# EAGLE board bluebox (EAGLE 8.5.1)
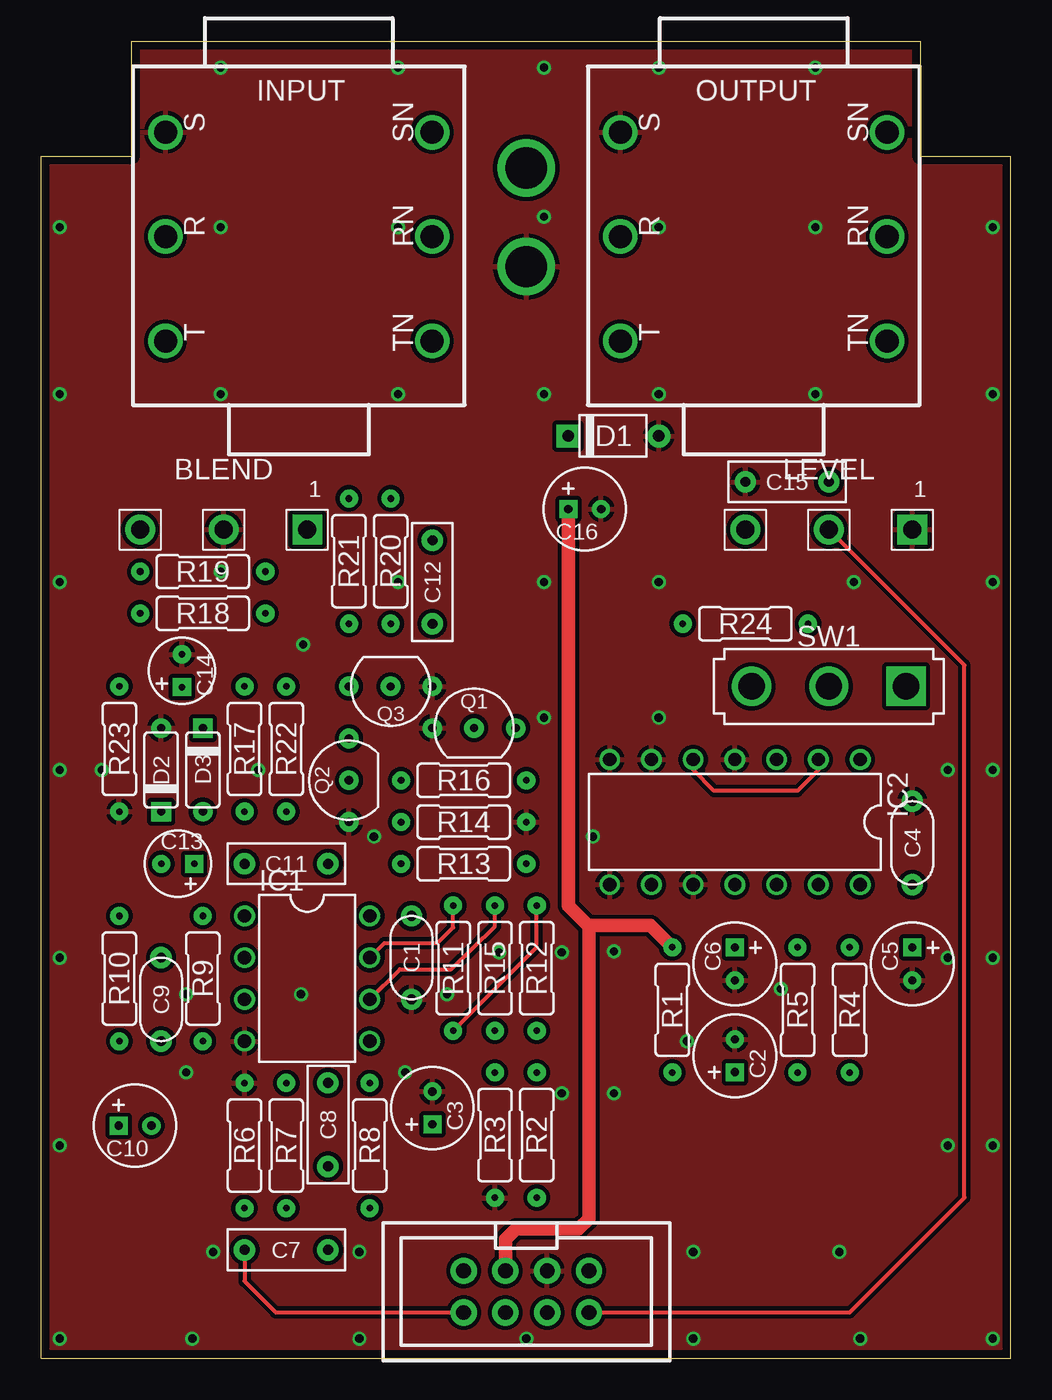
[diagram p0: board, top side]
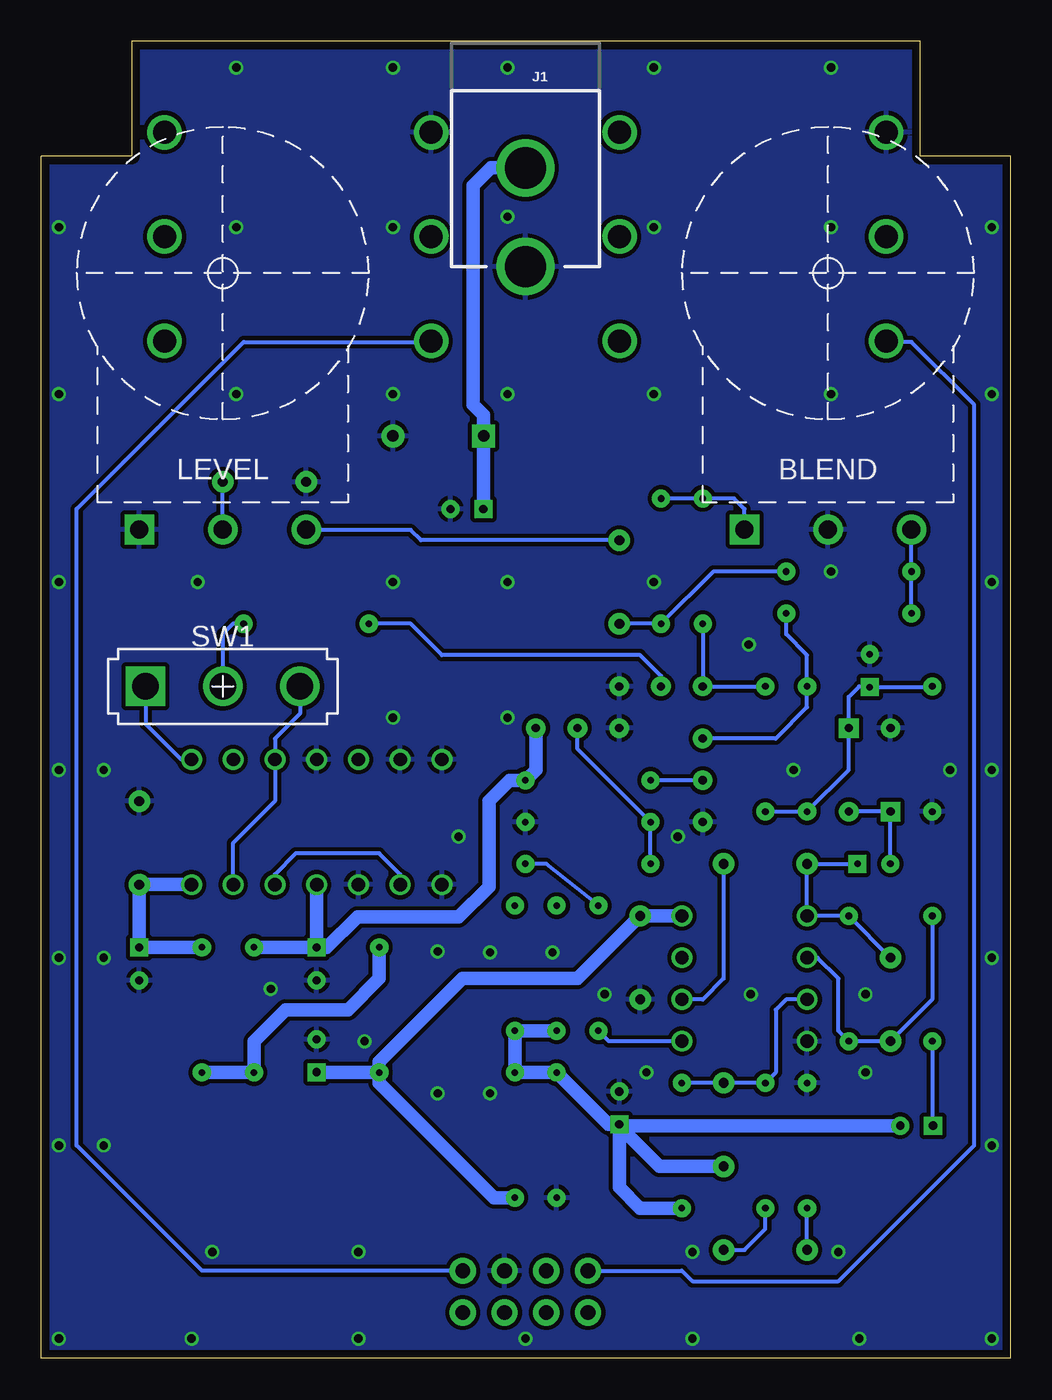
[diagram p1: board, bottom side, seen from below]

Size 59 x 80.16 mm. Coordinates in mm from the lower left corner, seen from the top.
Copper layers (1*16): Top 0.035mm / dielectric 1.6mm / Bottom 0.035mm
Design rules "Elecrow_2-layer_PCB_eagle_rule": minimum track width 6mil, minimum drill 12mil, track to track 6mil, track to pad 6mil, pad to pad 6mil, via to via 8mil, smd to smd 0mil, copper to edge 20mil, drill to drill 10mil, minimum pad ring 6mil, minimum via ring 6mil, stop-mask expansion 0mil, vias tented up to drill 100mil, thermal gap 10mil

## Footprints (pad centres in the part's own frame; a part is rotated, then mirrored left to right if it is on the bottom)
16MM = drill 1.1 pad 1.8 square: 1 5.08,-1 | drill 1.1 pad 1.8: 2 0,-1; 3 -5.08,-1
050X030_025_2 = drill 0.6 pad 1.3: 1 -2.54,0; 2 2.54,0
050_020 = drill 0.5 pad 1.1 square: + -0.998,0.001 | drill 0.5 pad 1.1: - 0.998,0.001
BOX_SMALL = drill 0.6 pad 1.3: 1 -2.54,0; 2 2.54,0
040_020 = drill 0.4 pad 1.1 square: + -1.001,0 | drill 0.4 pad 1.1: - 1.001,0
DO41-2 = drill 0.7 pad 1.4: A 2.794,0 | drill 0.7 pad 1.4 square: C -2.731,0
DO35-2 = drill 0.5 pad 1.2: A 2.54,0 | drill 0.5 pad 1.2 square: C -2.54,0
DIL0 = drill 0.813 pad 1.27: 1 -3.81,-3.81; 2 -1.27,-3.81; 3 1.27,-3.81; 4 3.81,-3.81; 5 3.81,3.81; 6 1.27,3.81; 7 -1.27,3.81; 8 -3.81,3.81
DIL14 = drill 0.813 pad 1.27: 1 -7.62,-3.81; 2 -5.08,-3.81; 3 -2.54,-3.81; 4 0,-3.81; 5 2.54,-3.81; 6 5.08,-3.81; 7 7.62,-3.81; 8 7.62,3.81; 9 5.08,3.81; 10 2.54,3.81; 11 0,3.81; 12 -2.54,3.81; 13 -5.08,3.81; 14 -7.62,3.81
NMJ6HCD2 = drill 1.4: R 0,8.115; RN 0,-8.115; S 6.35,8.115; SN 6.35,-8.115; T -6.35,8.115; TN -6.35,-8.115
POWER_JACK_PTH = drill 2.5: GND 0,7.7; PWR 0,13.7
TO92- = drill 0.5 pad 1.2: 1 2.54,0; 2 0,0; 3 -2.54,0
R0207/3 = drill 0.4 pad 1.1: 1 -3.81,0; 2 3.81,0
1MS1T1B1C0M2QE = drill 1.6 square: 1 4.699,0 | drill 1.6: 2 0,0; 3 -4.699,0
PAK100/2500-10 = drill 0.9 pad 1.6: 1 -3.81,-1.27; 2 -3.81,1.27; 3 -1.27,-1.27; 4 -1.27,1.27; 5 1.27,-1.27; 6 1.27,1.27; 7 3.81,-1.27; 8 3.81,1.27

## Placement (x,y rotation side)
BLEND  100kB  [16MM]  11.11,51.43 0 top
C1  100n  [050X030_025_2]  22.54,24.38 270 top
C2  100u  [050_020]  42.23,18.41 90 top
C3  47u  [050_020]  23.81,15.24 90 top
C4  100n  [050X030_025_2]  53.02,31.37 90 top
C5  100u  [050_020]  53.02,24 270 top
C6  100u  [050_020]  42.23,24 270 top
C7  10n  [BOX_SMALL]  14.92,6.6 180 top
C8  1n  [BOX_SMALL]  17.46,14.22 270 top
C9  330p  [050X030_025_2]  7.3,21.84 270 top
C10  10u  [050_020]  5.71,14.16 0 top
C11  47n  [BOX_SMALL]  14.92,30.1 180 top
C12  47n  [BOX_SMALL]  23.81,47.24 90 top
C13  1u  [040_020]  8.32,30.1 180 top
C14  1u  [040_020]  8.57,41.85 90 top
C15  6.8n  [BOX_SMALL]  45.4,53.34 180 top
C16  100u  [050_020]  33.08,51.69 0 top
D1  1N4002  [DO41-2]  34.8,56.13 0 top
D2  1N914  [DO35-2]  7.3,35.81 90 top
D3  1N914  [DO35-2]  9.84,35.81 270 top
IC1  [DIL0]  16.19,23.11 270 top
IC2  4013N  [DIL14]  42.23,32.64 180 top
INPUT  [NMJ6HCD2]  15.68,68.26 90 top
J1  POWER_JACK  [POWER_JACK_PTH]  29.53,80.14 180 bottom
LEVEL  100kB  [16MM]  47.94,51.43 0 top
OUTPUT  [NMJ6HCD2]  43.37,68.26 90 top
Q1  2N3904  [TO92-]  26.35,38.35 0 top
Q2  2N3904  [TO92-]  18.73,35.18 90 top
Q3  2N3904  [TO92-]  21.27,40.89 180 top
R1  47  [R0207/3]  38.42,21.21 270 top
R2  56k  [R0207/3]  30.16,13.59 90 top
R3  56k  [R0207/3]  27.62,13.59 90 top
R4  330  [R0207/3]  49.21,21.21 90 top
R5  10k  [R0207/3]  46.04,21.21 90 top
R6  2.2M  [R0207/3]  12.38,12.95 270 top
R7  150k  [R0207/3]  14.92,12.95 90 top
R8  1M  [R0207/3]  20,12.95 90 top
R9  470k  [R0207/3]  9.84,23.11 90 top
R10  150k  [R0207/3]  4.76,23.11 90 top
R11  1M  [R0207/3]  25.08,23.75 90 top
R12  10k  [R0207/3]  30.16,23.75 90 top
R13  56k  [R0207/3]  25.72,30.1 180 top
R14  10k  [R0207/3]  25.72,32.64 180 top
R15  56k  [R0207/3]  27.62,23.75 90 top
R16  1M  [R0207/3]  25.72,35.18 180 top
R17  56k  [R0207/3]  12.38,37.08 270 top
R18  56k  [R0207/3]  9.84,45.34 180 top
R19  56k  [R0207/3]  9.84,47.88 180 top
R20  56k  [R0207/3]  21.27,48.51 90 top
R21  56k  [R0207/3]  18.73,48.51 270 top
R22  56k  [R0207/3]  14.92,37.08 270 top
R23  56k  [R0207/3]  4.76,37.08 90 top
R24  1M  [R0207/3]  42.86,44.7 0 top
SW1  [1MS1T1B1C0M2QE]  47.94,40.89 0 top
U$2  [125B_PCB_HUGE]  0,-7.62 0 top  (outside the outline)
X1  2510-  [PAK100/2500-10]  29.53,4.06 180 top

## Library data of the parts
BLEND LEVEL = pedals-potentiometers
C1 C4 C7-C9 C11 C12 C15 = pedals-capacitors-film
C2 C3 C5 C6 C10 C13 C14 C16 = pedals-capacitors-elec
D1-D3 = pedals-diodes
IC1 IC2 = pedals-integrated circuits
INPUT OUTPUT = pedals-jacks
J1 = pedals-jacks; PROD_ID: CONN-08197
Q1-Q3 = pedals-transistors
R1-R24 = pedals-resistors
SW1 = pedals-switches
U$2 = pedals-pcb
X1 = pedals-headers; MF: 3M; MPN: 2510-6002UB; OC_FARNELL: 9838244; OC_NEWARK: 46F4725

## Nets
+9V: C16.+ D1.C J1.GND R1.1 R4.1 R5.1 X1.5
GND: BLEND.2 C1.2 C2.- C3.- C4.2 C5.- C6.- C14.- C15.2 C16.- D1.A D2.A IC1.4 IC2.4 IC2.6 IC2.7 IC2.8 IC2.10 INPUT.S J1.PWR LEVEL.1 OUTPUT.S Q1.3 Q2.3 Q3.3 R3.1 R6.1 R14.1 R23.1 X1.3
IN: C7.2 R6.2 X1.8
N$1: Q3.1 R21.2 R22.1
N$2: INPUT.T X1.7
N$3: C7.1 R7.1
N$4: OUTPUT.T X1.1
N$5: C8.1 IC1.3 R7.2 R8.2
N$6: C9.2 IC1.2 R9.1 R10.2
N$7: C9.1 C11.2 C13.+ IC1.1 R9.2
N$8: C10.+ R10.1
N$9: C11.1 IC1.6 R15.2
N$10: IC1.5 R11.1 R12.2
N$11: IC1.7 R11.2 R13.1
N$12: Q1.2 R13.2 R14.2
N$13: Q2.2 R16.2
N$14: Q2.1 R17.1 R18.1
N$15: BLEND.3 R18.2 R19.2
N$16: BLEND.1 R20.2 R21.1
N$17: C12.1 R19.1 R20.1
N$18: C14.+ D3.C R17.2 R22.2 R23.2
N$19: Q3.2 R24.1
N$20: C13.- D2.C D3.A
N$21: C12.2 LEVEL.3
N$22: IC2.3 IC2.13 SW1.3
N$23: IC2.9 IC2.12
N$24: IC2.1 SW1.1
N$25: IC2.2 IC2.5
N$27: R24.2 SW1.2
OUT: C15.1 LEVEL.2 X1.2
VB: C3.+ C8.2 C10.- R2.2 R3.2 R8.1 R12.1 R15.1
VC: C4.1 C5.+ IC2.14 R4.2
VD: C6.+ IC2.11 Q1.1 R5.2 R16.1
VR: C1.1 C2.+ IC1.8 R1.2 R2.1

## Tracks (layer width: path | path; a pad name or v marks a point on that pad's centre or on a via)
+9V
  Top 0.813: C16.+ 32.09,27.54 33.27,26.35 | R1.1 37.08,26.35 33.27,26.35 | X1.5 28.26,7.24 28.89,7.87 32.7,7.87 33.34,8.51 33.34,26.29 33.27,26.35
  Bottom 0.813: R1.1 38.42,23.11 40.32,21.21 44.13,21.21 46.04,19.3 R5.1 R4.1 | J1.GND 31.63,72.44 32.7,71.37 32.7,58.04 32.07,57.4 D1.C 32.07,51.71 C16.+
GND  (via drill 0.5 pad 0.85)
  other vias: 57.91,68.83 57.91,58.67 10.92,78.55 21.72,78.55 30.61,78.55 1.14,58.67 10.92,68.83 10.92,58.67 21.72,58.67 30.61,69.47 30.61,58.67 37.59,78.55 47.12,78.55 37.59,68.83 37.59,58.67 47.12,68.83 47.12,58.67 57.91,47.24 57.91,35.81 57.91,24.38 57.91,12.95 57.91,1.21 49.85,1.21 39.69,1.21 29.53,1.21 19.37,1.21 9.21,1.21 1.14,1.21 1.14,68.83 1.14,47.24 1.14,35.81 1.14,24.38 1.14,12.95 21.72,68.83 39.69,6.48 48.58,6.48 55.18,12.95 55.18,24.38 55.18,35.81 49.47,47.24 19.37,6.48 10.48,6.48 37.59,47.24 37.59,38.99 30.61,47.24 30.61,38.99 21.72,47.24 10.92,47.88 45.02,22.48 39.31,19.3 34.86,16.13 31.69,16.13 34.86,24.77 31.69,24.7 33.59,31.75 27.88,24.7 24.7,22.16 22.16,17.4 8.83,17.4 8.83,22.16 15.81,22.16 20.26,31.75 3.68,35.81 13.21,35.81 15.94,43.43
  pour Bottom (isolate 0.254): 0.32,79.63 58.74,79.63 58.74,-0.38 0.32,-0.38
  pour Top (isolate 0.254): -0.32,-0.38 59.37,-0.38 59.37,80.9 -0.32,80.9
IN
  Top 0.254: C7.2 12.38,4.7 14.29,2.79 X1.8
  Bottom 0.254: C7.2 R6.2
N$1
  Bottom 0.254: R22.1 Q3.1 R21.2
N$2
  Bottom 0.254: X1.7 20,5.33 19.37,4.7 10.48,4.7 2.22,12.95 2.22,58.04 6.03,61.85 7.51,61.85 INPUT.T
N$3
  Bottom 0.254: C7.1 16.19,6.6 14.92,7.87 R7.1
N$4
  Bottom 0.254: X1.1 49.21,5.33 56.83,12.95 56.83,51.69 46.67,61.85 35.32,61.85 OUTPUT.T
N$5
  Bottom 0.254: R8.2 C8.1 R7.2 14.29,17.4 14.29,21.21 13.65,21.84 IC1.3
N$6
  Bottom 0.254: R10.2 4.76,21.84 C9.2 R9.1 10.48,19.94 10.48,23.11 11.75,24.38 IC1.2
N$7
  Bottom 0.254: C9.1 R9.2 IC1.1 C11.2 C13.+
N$8
  Bottom 0.254: C10.+ 4.72,19.26 R10.1
N$9
  Top 0.254: IC1.6 21.84,23.69 24.96,23.69 27.62,26.29 R15.2
  Bottom 0.254: C11.1 17.46,23.11 18.73,21.84 IC1.6
N$10
  Top 0.254: R11.1 30.16,25.02 R12.2
  Bottom 0.254: IC1.5 24.45,19.3 R11.1
N$11
  Top 0.254: IC1.7 20.89,25.27 24.13,25.27 25.08,26.23 R11.2
  Bottom 0.254: R11.2 28.26,30.1 R13.1
N$12
  Bottom 0.254: R13.2 R14.2 26.35,37.08 Q1.2
N$13
  Bottom 0.254: Q2.2 R16.2
N$14
  Bottom 0.254: Q2.1 14.29,37.72 12.38,39.62 R17.1 12.38,42.8 13.65,44.07 R18.1
N$15
  Bottom 0.254: R18.2 R19.2 BLEND.3
N$16
  Bottom 0.254: BLEND.1 16.19,51.69 16.83,52.32 R21.1 R20.2
N$17
  Bottom 0.254: R19.1 18.1,47.88 R20.1 C12.1
N$18
  Bottom 0.254: R22.2 R17.2 9.84,35.81 D3.C 9.84,40.26 9.21,40.89 8.62,40.89 C14.+ 4.81,40.85 R23.2
N$19
  Bottom 0.254: Q3.2 21.27,41.53 22.54,42.8 34.61,42.8 36.51,44.7 R24.1
N$20
  Bottom 0.254: C13.- 7.32,33.26 D2.C D3.A
N$21
  Bottom 0.254: C12.2 35.88,49.78 36.51,50.42 42.85,50.42 LEVEL.3
N$22
  Bottom 0.254: IC2.13 47.31,31.37 44.77,33.91 IC2.3 44.77,37.72 43.24,39.24 SW1.3
N$23
  Bottom 0.254: IC2.9 37.15,29.46 38.42,30.73 43.5,30.73 44.77,29.46 IC2.12
N$24
  Bottom 0.254: SW1.1 52.64,38.61 50.48,36.45 IC2.1
N$25
  Top 0.254: IC2.5 39.69,35.81 40.96,34.54 46.04,34.54 47.31,35.81 IC2.2
N$27
  Bottom 0.254: R24.2 47.31,44.7 47.94,44.07 SW1.2
OUT
  Top 0.254: X1.2 49.21,2.79 56.2,9.78 56.2,42.18 LEVEL.2
  Bottom 0.254: LEVEL.2 C15.1
VB
  Bottom 0.813: R15.1 R12.1 R2.2 R3.2 24.47,14.24 C3.+ 23.77,14.16 | 23.77,14.16 C10.- | R8.1 22.54,9.14 23.81,10.41 23.81,14.12 | 23.81,14.12 23.77,14.16 | C8.2 21.38,11.68 23.81,14.12
VC
  Bottom 0.813: IC2.14 C4.1 C5.+ 53.01,25.02 R4.2
VD
  Bottom 0.813: C6.+ 46.02,25 R5.2 | C6.+ IC2.11 | C6.+ 41.61,25 39.75,26.86 33.59,26.86 31.75,28.7 31.75,33.91 30.48,35.18 R16.1 28.89,35.81 Q1.1
VR
  Bottom 0.813: R2.1 31.43,9.78 38.42,16.76 R1.2 | IC1.8 C1.1 26.35,23.11 33.34,23.11 38.42,18.03 R1.2 | R1.2 42.21,17.4 C2.+